# Altium PCB Pulp FMC Sensor Board_4X512Mbits_HyperRam.PcbDoc (part 1 of 2)
Units mm, origin at the board's own origin, x right, y up, seen from the top; angles counter-clockwise.
Board outline 62.85 x 58.85 mm, 4 copper layers (Top Layer, GND, PWR, Bottom Layer), stack 1.56 mm thick; 27 components, 33 nets, 302 pads, 158 vias.
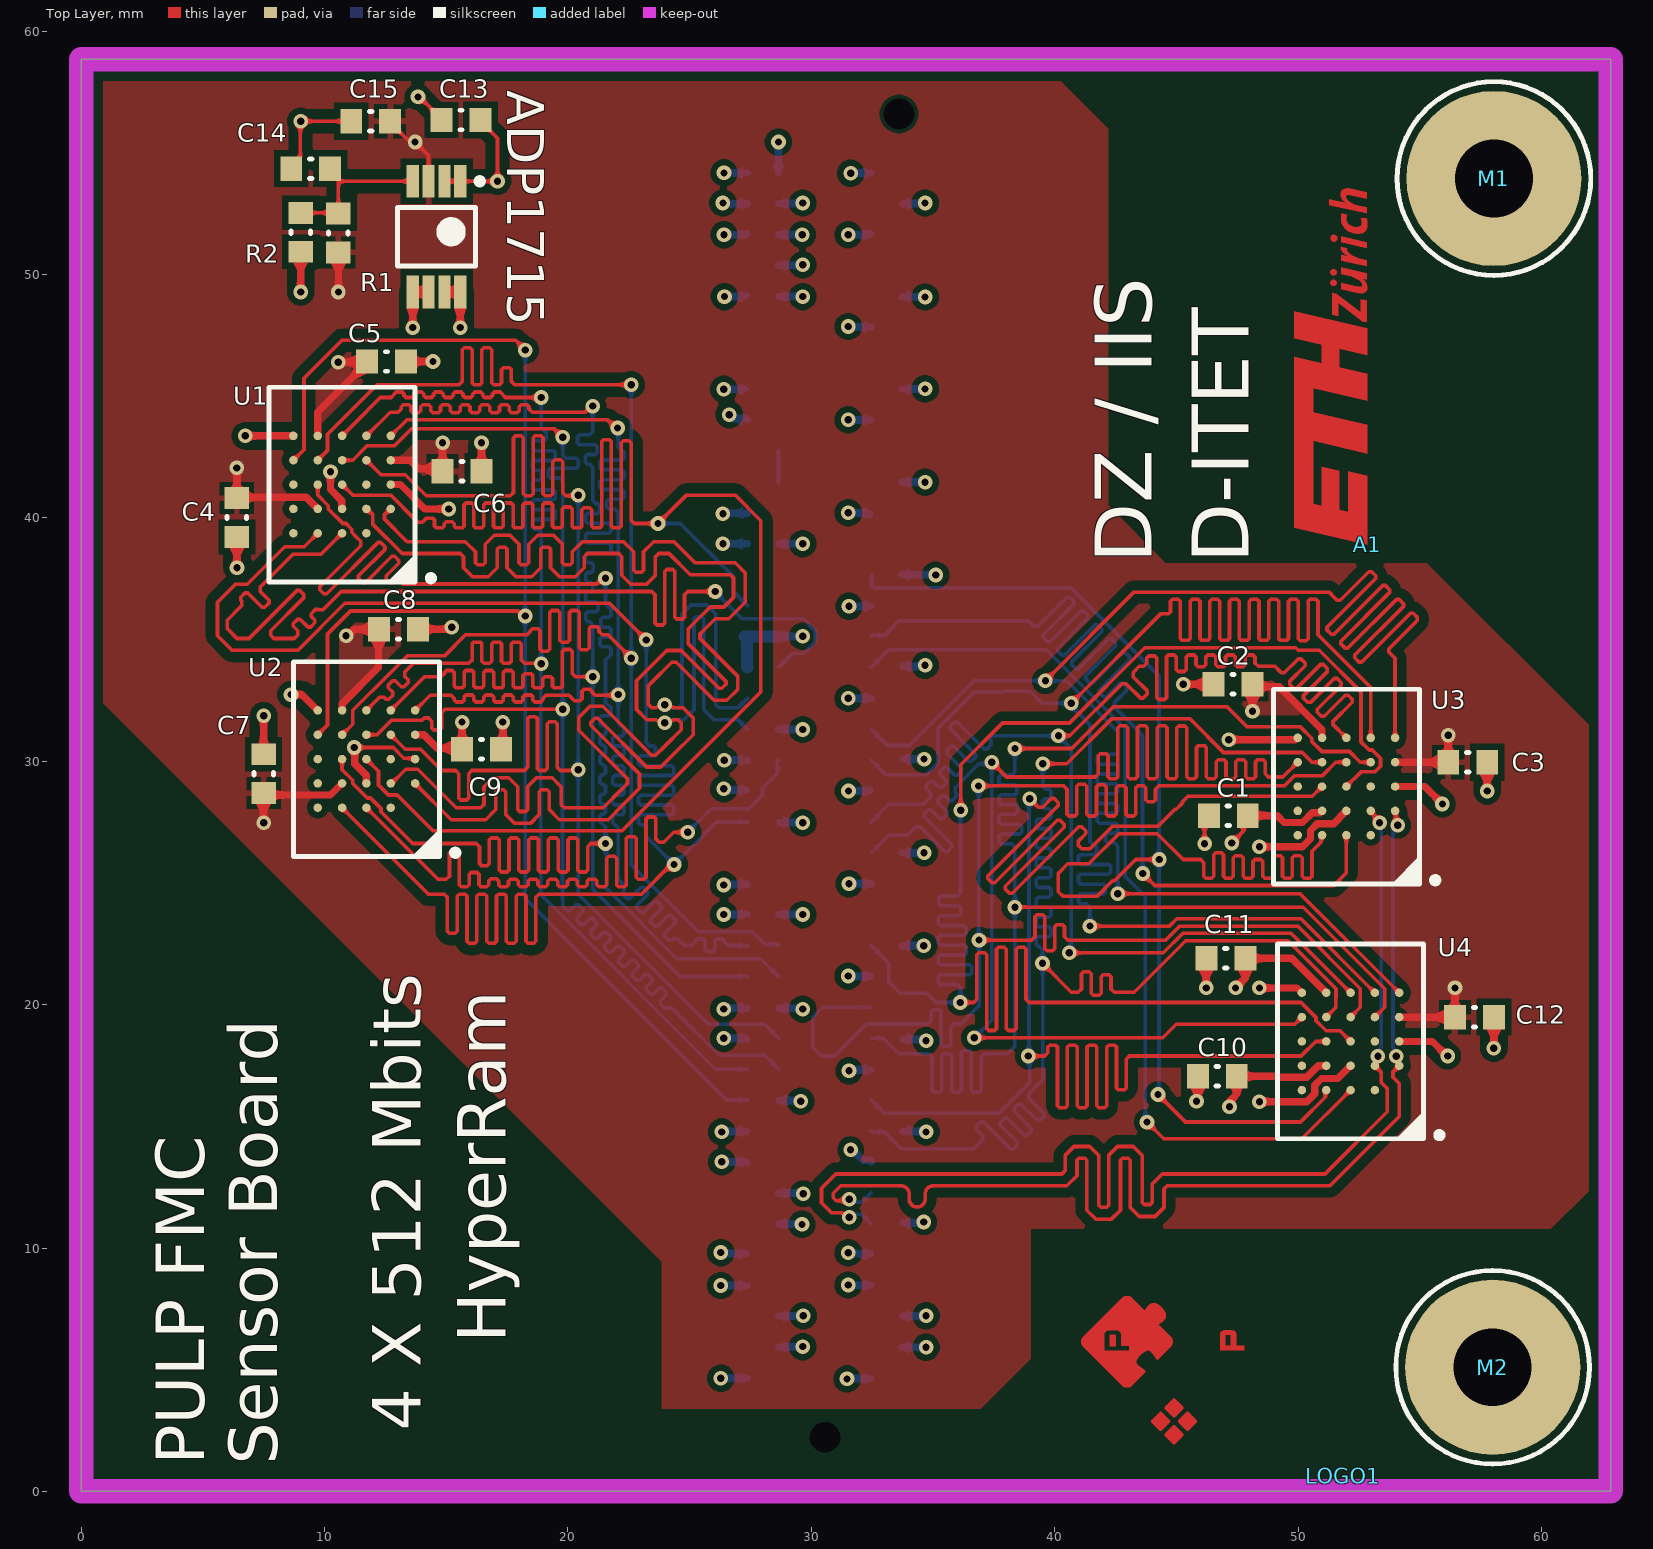
[diagram p0: Top Layer view]
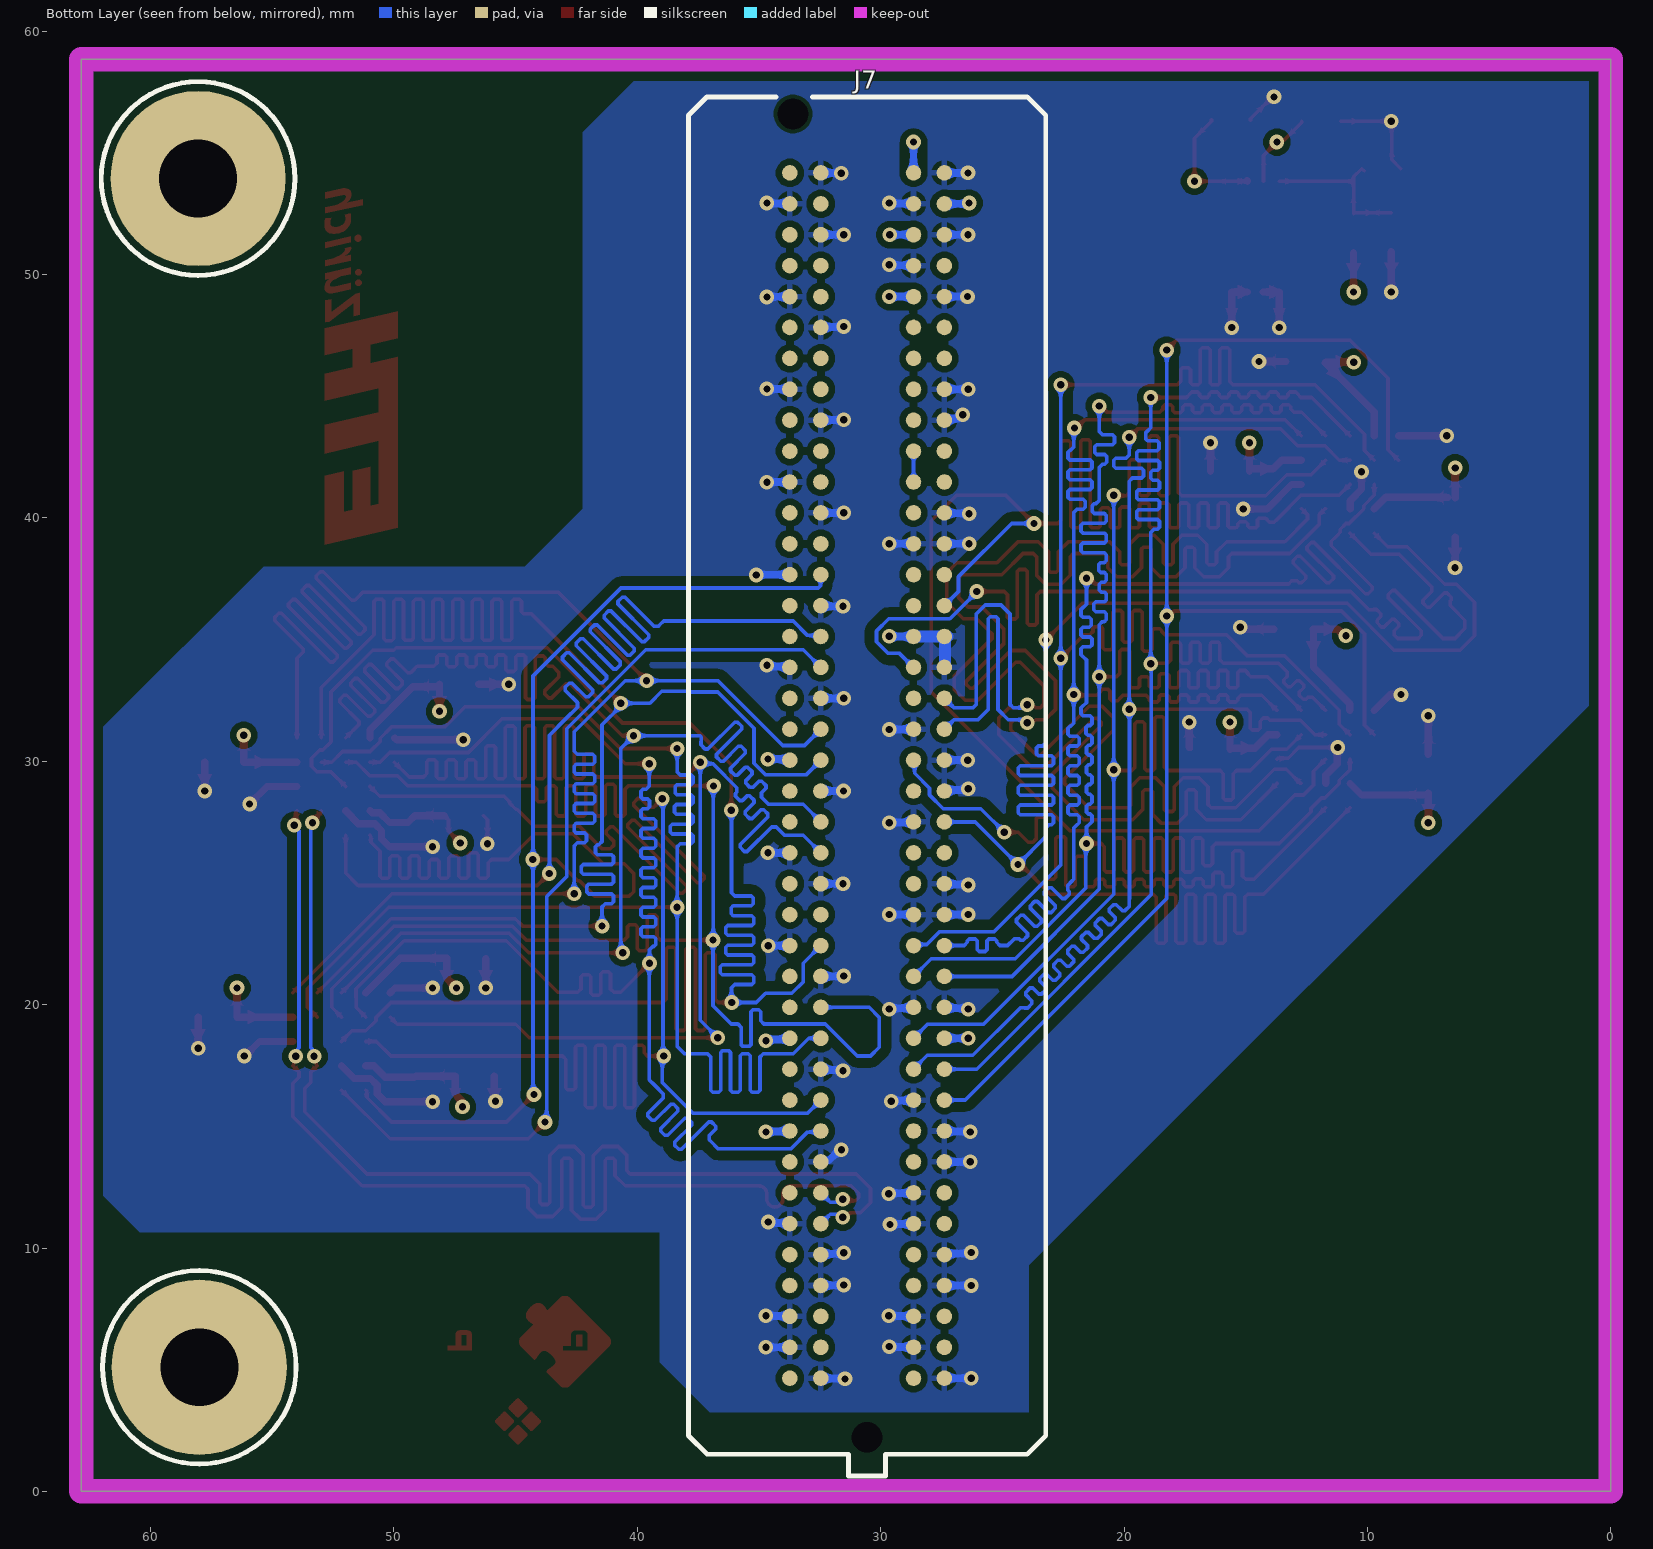
[diagram p1: Bottom Layer view, seen from below]
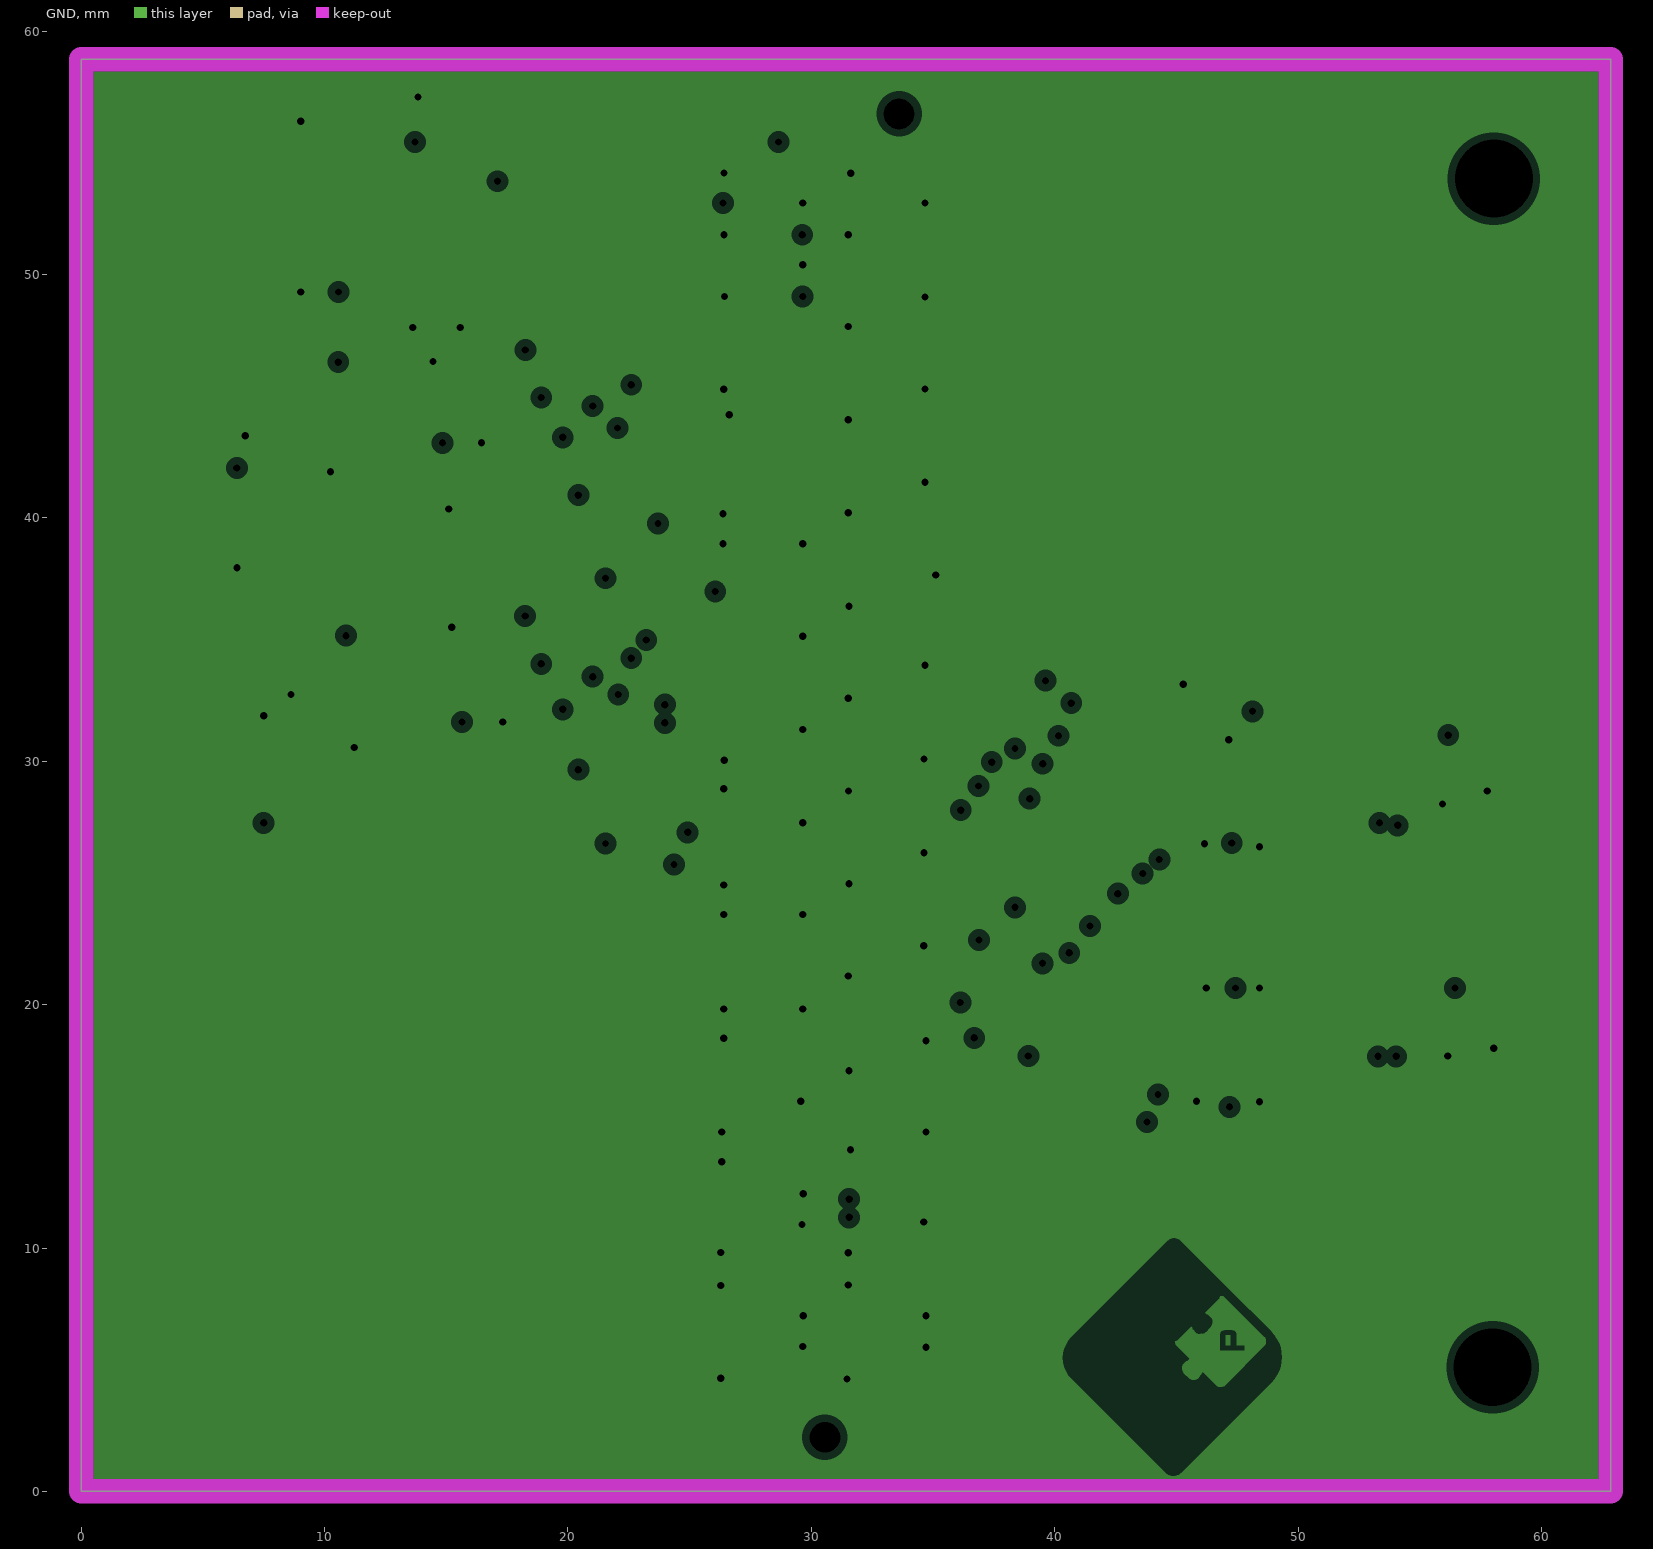
[diagram p2: GND, clearances drawn from the general rule]
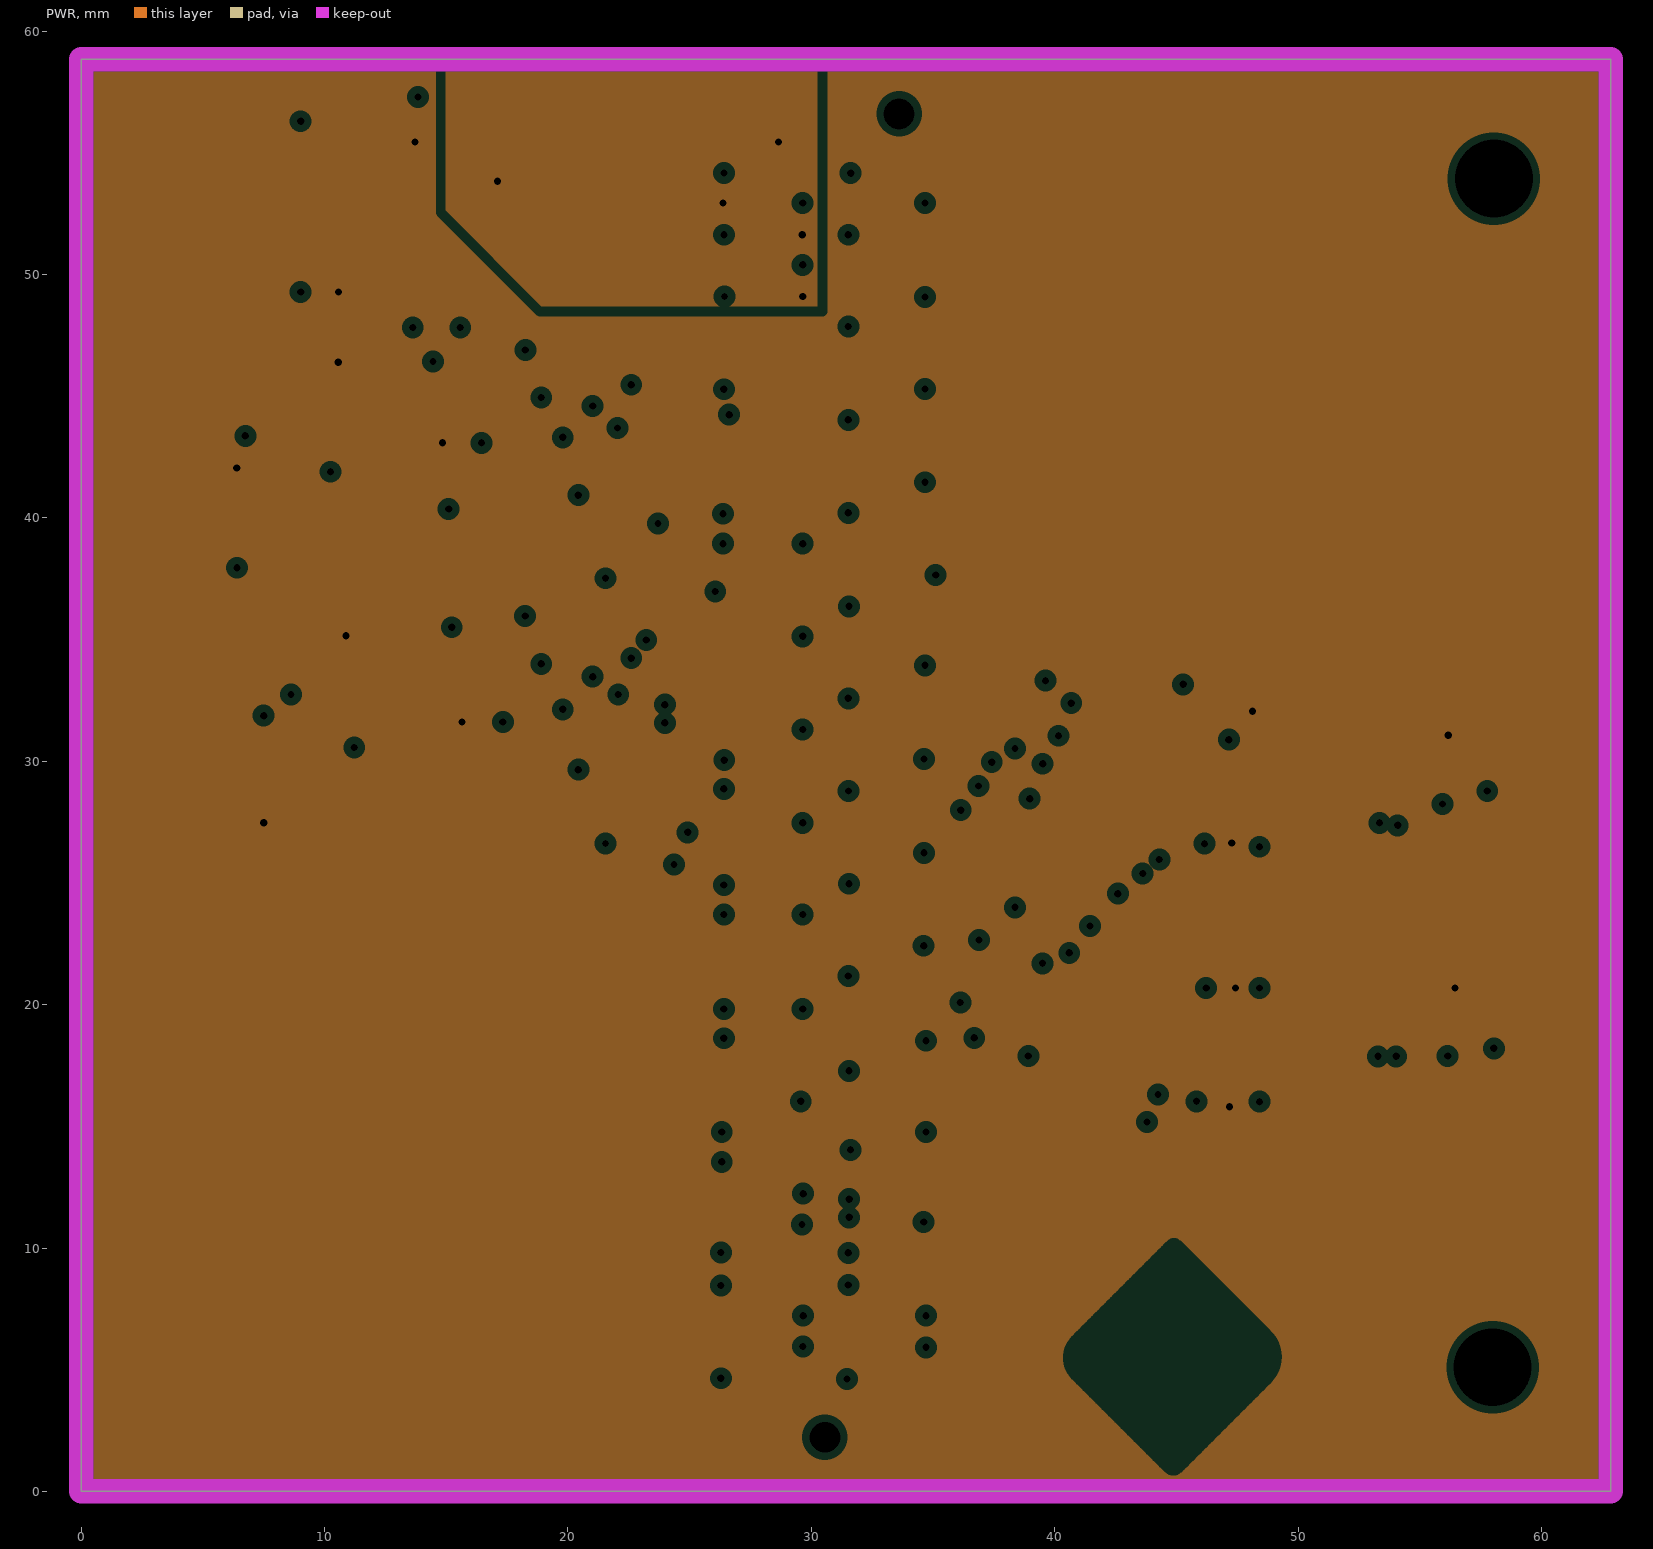
[diagram p3: PWR, clearances drawn from the general rule]

## Layer stack, top to bottom
Top Solder: solder mask 0.0254, SM-001, Dk 4
Top Layer: signal copper 0.035
Dielectric 1: prepreg 0.11, PP-017, Dk 4.29
GND: plane copper 0.035, net GND
Dielectric 3: core 1.2, Core-039, Dk 4.8
PWR: plane copper 0.035, net (Multiple Nets)
Dielectric 5: prepreg 0.11, PP-017, Dk 4.29
Bottom Layer: signal copper 0.035
Bottom Solder: solder mask 0.0254, SM-001, Dk 4

## Board outline
0,0 0,58.85 62.85,58.85 62.85,0

## Design rules (kind name [scope] priority, off if disabled: settings)
BoardOutlineClearance [All] p1: gap=0 ignorepadtopadclearanceinfootprint=FALSE except(0.4: Poly-OutlineEdge)
Clearance [All] p1: gap=0.15 ignorepadtopadclearanceinfootprint=FALSE except(0.2: Poly-Region Region-Region; 0.254: SMDPad-Poly THPad-Poly Via-Poly Fill-Poly Poly-Poly; 0.4: Arc-Poly Track-Poly)
ComponentClearance [All] p1 off: gap=0.35 collisioncheckmode=3 verticalgap=0.254 showdistances=FALSE
DiffPairsRouting [All] p1: maxlimit=0.339 minlimit=0.339 mostfreqgap=0.339 toplayer_minwidth=0.15 toplayer_maxwidth=0.15 toplayer_prefwidth=0.15 bottomlayer_minwidth=0.15 bottomlayer_maxwidth=0.15 bottomlayer_prefwidth=0.15 impedanceprofiledriven=TRUE impedanceprofileid={85C87672-306A-484E-A9E4-BAF9E07183F3} impedanceprofilevalue=100.000000 maxuncoupledlength=10
FabricationTestPointUsage TestPointUsage [All] p1: valid=0 allowmultiple=FALSE
FabricationTestpoint Testpoint [(IsPad And (OnTopLayer Or OnBottomLayer))] p1: side=3 testpointundercomponent=TRUE minsize=1.016 maxsize=2.54 preferedsize=1.524 minholesize=0 maxholesize=1.016 preferedholesize=0.813 testpointgrid=0.025 allowsidetop=TRUE allowsidebottom=TRUE usegrid=TRUE gridtolerance=0
Height [All] p1 off: minheight=0 maxheight=25.4 prefheight=12.7
HoleSize [All] p1: absolutevalues=TRUE maxlimit=7 minlimit=0.3 maxpercent=80.000 minpercent=20.000
MatchedLengths MatchLengths_xSignals_U2 [InxSignalClass('xSignals_U2')] p1: tolerance=5 checknetsindiffpair=FALSE checkdiffpairvsdiffpair=TRUE checkxsignals=TRUE checkothers=TRUE
MatchedLengths MatchLengths_xSignals_U3 [InxSignalClass('xSignals_U3')] p2: tolerance=5 checknetsindiffpair=FALSE checkdiffpairvsdiffpair=TRUE checkxsignals=TRUE checkothers=TRUE
MatchedLengths MatchLengths_xSignals_U5 [InxSignalClass('xSignals_U5')] p3: tolerance=5 checknetsindiffpair=FALSE checkdiffpairvsdiffpair=TRUE checkxsignals=TRUE checkothers=TRUE
MatchedLengths MatchLengths_xSignals_U1 [InxSignalClass('xSignals_U1')] p4: tolerance=5 checknetsindiffpair=FALSE checkdiffpairvsdiffpair=TRUE checkxsignals=TRUE checkothers=TRUE
MatchedLengths MatchedLengths_Diff_Pairs [All] p5: tolerance=1 checknetsindiffpair=TRUE checkdiffpairvsdiffpair=FALSE checkxsignals=FALSE checkothers=FALSE
MinimumAnnularRing [All] p1 off: minimumring=0.15
MinimumSolderMaskSliver [All] p1: minsoldermaskwidth=0.099
PlaneClearance [All] p1: clearance=0.3
PlaneConnect [All] p1: pad.planeconnectstyle=Relief pad.reliefexpansion=0.25 pad.reliefentries=4 pad.reliefconductorwidth=0.2 pad.reliefairgap=0.2 via.planeconnectstyle=Direct via.reliefexpansion=0.25 via.reliefentries=4 via.reliefconductorwidth=0.2 via.reliefairgap=0.2
PolygonConnect [All] p1: thpad.connectstyle=Relief thpad.reliefconductorwidth=0.25 thpad.reliefentries=4 thpad.polygonreliefangle="90 Angle" thpad.airgapwidth=0.2 smdpad.connectstyle=Relief smdpad.reliefconductorwidth=0.25 smdpad.reliefentries=4 smdpad.polygonreliefangle="90 Angle" smdpad.airgapwidth=0.2 via.connectstyle=Direct via.reliefconductorwidth=0.25 via.reliefentries=4 via.polygonreliefangle="90 Angle" via.airgapwidth=0.2
RoutingVias [All] p1: holewidth=0.3 width=0.6 viastyle="Through Hole" minholewidth=0.3 minwidth=0.6 maxholewidth=0.8 maxwidth=1.2
SilkToSilkClearance [All] p1: silktosilkclearance=0.01
SilkToSolderMaskClearance [IsPad] p1: minsilkscreentomaskgap=0.01 clearancetoexposedcopper=TRUE
SolderMaskExpansion [All] p1: expansion=0.075 istentingtop=FALSE
SupplyNets "Schematic Supply Nets_2" [InNet('V3p3')] p1: voltage=0.000
SupplyNets "Schematic Supply Nets_1" [InNet('GND')] p2: voltage=0.000
SupplyNets "Schematic Supply Nets" [InNet('Vmem_low')] p3: voltage=0.000
Width [All] p1: maxlimit=0.5 minlimit=0.15 preferedwidth=0.15 minimp=50.000000 maximp=50.000000 favimp=50.000000
19 further rules are at their usual default settings.

## Classes and differential pairs
net class Hyper2: FMC_HYPER2_CK_N FMC_HYPER2_CK_P FMC_HYPER2_CSN0 FMC_HYPER2_CSN1 FMC_HYPER2_D0 FMC_HYPER2_D1 FMC_HYPER2_D2 FMC_HYPER2_D3 FMC_HYPER2_D4 FMC_HYPER2_D5 FMC_HYPER2_D6 FMC_HYPER2_D7 FMC_HYPER2_RWDS
net class FMC_HYPER2_D[0..7]: FMC_HYPER2_D0 FMC_HYPER2_D1 FMC_HYPER2_D2 FMC_HYPER2_D3 FMC_HYPER2_D4 FMC_HYPER2_D5 FMC_HYPER2_D6 FMC_HYPER2_D7
net class FMC_HYPER2_CSN[0..1]: FMC_HYPER2_CSN0 FMC_HYPER2_CSN1
net class Hyper: FMC_HYPER_CK_N FMC_HYPER_CK_P FMC_HYPER_CSN0 FMC_HYPER_CSN1 FMC_HYPER_D0 FMC_HYPER_D1 FMC_HYPER_D2 FMC_HYPER_D3 FMC_HYPER_D4 FMC_HYPER_D5 FMC_HYPER_D6 FMC_HYPER_D7 FMC_HYPER_RWDS
net class FMC_HYPER_D[0..7]: FMC_HYPER_D0 FMC_HYPER_D1 FMC_HYPER_D2 FMC_HYPER_D3 FMC_HYPER_D4 FMC_HYPER_D5 FMC_HYPER_D6 FMC_HYPER_D7
net class FMC_HYPER_CSN[0..1]: FMC_HYPER_CSN0 FMC_HYPER_CSN1
component class U_HyperRAM: C1 C2 C3 C10 C11 C12 U3 U4
component class "U_FMC and Power": ADP1715 C13 C14 C15 J7 R1 R2
pad class DirectConnect: 30501-1 30501-2 30501-3 30501-4 30501-5 30501-6 30501-7 30501-8 30501-9 30502-1 30502-2 30502-3 30502-4 30502-5 30502-6 30502-7 30502-8 30502-9 30503-1 30503-2 30503-3 30503-4 30503-5 30503-6 30503-7 30503-8 30503-9 30504-1 30504-2 30504-3 30504-4 30504-5 30504-6 30504-7 30504-8 30504-9
pad class Sense: DPS1-A6 DPS1-A12 DPS1-B5 DPS1-B7 DPS1-B11 DPS1-B13 DPS1-B17 DPS1-C2 DPS1-C6 DPS1-C12 DPS1-C16 DPS2-A6 DPS2-A12 DPS2-B3 DPS2-B5 DPS2-B11 DPS2-B13 DPS2-C2 DPS2-C6 DPS2-C12 DPS2-C16 DPS3-C12
pad class Vias: DPS8-A9
pad class ExtendedClearance: O3216-A
component class U_HyperRAM2: A1 C4 C5 C6 C7 C8 C9 LOGO1 M1 M2 U1 U2
differential pair FMC_HYPER_CK: +FMC_HYPER_CK_P -FMC_HYPER_CK_N
differential pair FMC_HYPER2_CK: +FMC_HYPER2_CK_P -FMC_HYPER2_CK_N

## Components (designator, comment, footprint, x,y, rotation, side; value= is the part's Value field where it differs from the comment)
A1 "Logo ETH Zurich" eth-zurich_3mm 52.85,38.9 r90 top
ADP1715 "ADP1715" TSOP65P490X110-8N 14.597,51.563 r270 top
C1 "CAP 100nF 25V 0603(1608)" CAPC0603(1608)100_N 47.135,27.77 r0 top value=100nF
C2 "CAP 100nF 25V 0603(1608)" CAPC0603(1608)100_N 47.33,33.165 r0 top value=100nF
C3 "CAP 100nF 25V 0603(1608)" CAPC0603(1608)100_N 56.975,29.965 r180 top value=100nF
C4 "CAP 100nF 25V 0603(1608)" CAPC0603(1608)100_N 6.392,40.02 r90 top value=100nF
C5 "CAP 100nF 25V 0603(1608)" CAPC0603(1608)100_N 12.541,46.43 r180 top value=100nF
C6 "CAP 100nF 25V 0603(1608)" CAPC0603(1608)100_N 15.647,41.925 r180 top value=100nF
C7 "CAP 100nF 25V 0603(1608)" CAPC0603(1608)100_N 7.492,29.493 r270 top value=100nF
C8 "CAP 100nF 25V 0603(1608)" CAPC0603(1608)100_N 13.035,35.431 r180 top value=100nF
C9 "CAP 100nF 25V 0603(1608)" CAPC0603(1608)100_N 16.447,30.493 r180 top value=100nF
C10 "CAP 100nF 25V 0603(1608)" CAPC0603(1608)100_N 46.682,17.058 r0 top value=100nF
C11 "CAP 100nF 25V 0603(1608)" CAPC0603(1608)100_N 47.035,21.905 r0 top value=100nF
C12 "CAP 100nF 25V 0603(1608)" CAPC0603(1608)100_N 57.25,19.489 r180 top value=100nF
C13 "CAP 2.2 µF 25V 0603 (1608)" CAPC0603(1608)100_N 15.604,56.355 r180 top value=2.2uF
C14 "CAP 10nF 50V 0603(1608)" CAPC0603(1608)100_N 9.426,54.358 r0 top value=10nF
C15 "CAP 2.2 µF 25V 0603 (1608)" CAPC0603(1608)100_N 11.892,56.305 r0 top value=2.2uF
J7 "ASP-134604-01" ASP-134604-01 30.555,29.415 r270 bottom
LOGO1 "Logo Pulp" "Logo Pulp" 51.865,0.636 r90 top
M1 "Mounting Hole" "Hole M3" 58.05,53.95 r0 top
M2 "Mounting Hole" "Hole M3" 58,5.1 r0 top
R1 "15K 5% 0603(1608)" RESC0603(1608)_N 10.566,51.713 r270 top value="15K DNP"
R2 "12K 5% 0603(1608)" RESC0603(1608)_N 9.016,51.741 r90 top value=12KDNP
U1 "S80KS5122" FBGA24_A-130 10.716,41.375 r180 top
U2 "S80KS5122" FBGA24_A-130 11.716,30.093 r180 top
U3 "S80KS5122" FBGA24_A-130 51.988,28.965 r180 top
U4 "S80KS5122" FBGA24_A-130 52.159,18.489 r180 top

## Footprints (in the part's own frame and the unit in brackets; to place one, negate y for a bottom-side part, rotate by r counter-clockwise, add the part's x,y. Pads: shape width x height; smd on the part's side, far side on the other; paste and mask are expansions set on the pad)
ASP-134604-01 [mm] "FMC 160 Position Connector Array, Male Pins Surface Mount Gold"
  round 0.64 smd: C1(24.765,3.175) C2(23.495,3.175) C3(22.225,3.175) C4(20.955,3.175) C5(19.685,3.175) C6(18.415,3.175) C7(17.145,3.175) C8(15.875,3.175) C9(14.605,3.175) C10(13.335,3.175) C11(12.065,3.175) C12(10.795,3.175) C13(9.525,3.175) C14(8.255,3.175) C15(6.985,3.175) C16(5.715,3.175) C17(4.445,3.175) C18(3.175,3.175) C19(1.905,3.175) C20(0.635,3.175) C21(-0.635,3.175) C22(-1.905,3.175) C23(-3.175,3.175) C24(-4.445,3.175) C25(-5.715,3.175) C26(-6.985,3.175) C27(-8.255,3.175) C28(-9.525,3.175) C29(-10.795,3.175) C30(-12.065,3.175) C31(-13.335,3.175) C32(-14.605,3.175) C33(-15.875,3.175) C34(-17.145,3.175) C35(-18.415,3.175) C36(-19.685,3.175) C37(-20.955,3.175) C38(-22.225,3.175) C39(-23.495,3.175) C40(-24.765,3.175) D1(24.765,1.905) D2(23.495,1.905) D3(22.225,1.905) D4(20.955,1.905) D5(19.685,1.905) D6(18.415,1.905) D7(17.145,1.905) D8(15.875,1.905) D9(14.605,1.905) D10(13.335,1.905) D11(12.065,1.905) D12(10.795,1.905) D13(9.525,1.905) D14(8.255,1.905) D15(6.985,1.905) D16(5.715,1.905) D17(4.445,1.905) D18(3.175,1.905) D19(1.905,1.905) D20(0.635,1.905) D21(-0.635,1.905) D22(-1.905,1.905) D23(-3.175,1.905) D24(-4.445,1.905) D25(-5.715,1.905) D26(-6.985,1.905) D27(-8.255,1.905) D28(-9.525,1.905) D29(-10.795,1.905) D30(-12.065,1.905) D31(-13.335,1.905) D32(-14.605,1.905) D33(-15.875,1.905) D34(-17.145,1.905) D35(-18.415,1.905) D36(-19.685,1.905) D37(-20.955,1.905) D38(-22.225,1.905) D39(-23.495,1.905) D40(-24.765,1.905) G1(24.765,-1.905) G2(23.495,-1.905) G3(22.225,-1.905) G4(20.955,-1.905) G5(19.685,-1.905) G6(18.415,-1.905) G7(17.145,-1.905) G8(15.875,-1.905) G9(14.605,-1.905) G10(13.335,-1.905) G11(12.065,-1.905) G12(10.795,-1.905) G13(9.525,-1.905) G14(8.255,-1.905) G15(6.985,-1.905) G16(5.715,-1.905) G17(4.445,-1.905) G18(3.175,-1.905) G19(1.905,-1.905) G20(0.635,-1.905) G21(-0.635,-1.905) G22(-1.905,-1.905) G23(-3.175,-1.905) G24(-4.445,-1.905) G25(-5.715,-1.905) G26(-6.985,-1.905) G27(-8.255,-1.905) G28(-9.525,-1.905) G29(-10.795,-1.905) G30(-12.065,-1.905) G31(-13.335,-1.905) G32(-14.605,-1.905) G33(-15.875,-1.905) G34(-17.145,-1.905) G35(-18.415,-1.905) G36(-19.685,-1.905) G37(-20.955,-1.905) G38(-22.225,-1.905) G39(-23.495,-1.905) G40(-24.765,-1.905) H1(24.765,-3.175) H2(23.495,-3.175) H3(22.225,-3.175) H4(20.955,-3.175) H5(19.685,-3.175) H6(18.415,-3.175) H7(17.145,-3.175) H8(15.875,-3.175) H9(14.605,-3.175) H10(13.335,-3.175) H11(12.065,-3.175) H12(10.795,-3.175) H13(9.525,-3.175) H14(8.255,-3.175) H15(6.985,-3.175) H16(5.715,-3.175) H17(4.445,-3.175) H18(3.175,-3.175) H19(1.905,-3.175) H20(0.635,-3.175) H21(-0.635,-3.175) H22(-1.905,-3.175) H23(-3.175,-3.175) H24(-4.445,-3.175) H25(-5.715,-3.175) H26(-6.985,-3.175) H27(-8.255,-3.175) H28(-9.525,-3.175) H29(-10.795,-3.175) H30(-12.065,-3.175) H31(-13.335,-3.175) H32(-14.605,-3.175) H33(-15.875,-3.175) H34(-17.145,-3.175) H35(-18.415,-3.175) H36(-19.685,-3.175) H37(-20.955,-3.175) H38(-22.225,-3.175) H39(-23.495,-3.175) H40(-24.765,-3.175)
  round 0.97 hole 1.27 unplated: MH1(-27.19,-3.05) MH2(27.19,0)
  silkscreen extent -27.89,-7.34 28.78,7.34, body extent -27.89,-7.34 28.78,7.34, height 7.12
CAPC0603(1608)100_N [mm] "Chip Capacitor, Body 1.6x0.8mm, Height 1.0mm, IPC Medium Density"
  rect 0.9x1 smd: 1(-0.8,0) 2(0.8,0)
  silkscreen extent -0.05,-0.4 0.05,0.4, body extent -0.87,-0.48 0.88,0.47, height 1
eth-zurich_3mm [mm] "Logo ETH Zurich"
  Top Layer circle w0.27: c10.764,1.389 r0.001
  Top Layer circle w0.27: c11.193,1.389 r0.001
  Top Layer circle w0.3: c12.598,1.372 r0.001
  Top Layer region: 8.895,0 8.895,0 9.6,3 8.493,3 8.227,1.87 7.459,1.87 7.723,3 0.705,3 0,0 1.171,0 2.838,0 3.021,0.78 1.356,0.78 1.442,1.146 3.034,1.146 3.204,1.866 1.609,1.866 1.693,2.22 4.273,2.22 3.75,0 4.923,0 5.445,2.22 6.433,2.22 5.913,0 7.02,0 7.29,1.151 8.058,1.151 7.788,0
  Top Layer region: 10.359,1.44 10.359,1.44 9.452,1.44 9.396,1.191 9.945,1.191 9.172,0.185 9.138,0.024 10.044,0.024 10.099,0.273 9.549,0.273 10.325,1.284
  Top Layer region: 11.166,0.024 11.166,0.024 11.398,1.071 11.121,1.071 11.031,0.661 10.98,0.54 10.92,0.432 10.86,0.336 10.8,0.273 10.752,0.24 10.704,0.216 10.668,0.216 10.632,0.228 10.608,0.252 10.602,0.288 10.602,0.336 10.608,0.378 10.763,1.071 10.496,1.071 10.38,0.54 10.336,0.342 10.332,0.252 10.344,0.168 10.368,0.096 10.416,0.048 10.476,0.012 10.524,0 10.62,0 10.716,0.024 10.8,0.072 10.863,0.135 10.932,0.216 10.89,0.024
  Top Layer region: 11.857,0.78 11.857,0.78 11.922,1.071 11.676,1.071 11.444,0.024 11.689,0.024 11.727,0.193 11.784,0.378 11.85,0.54 11.904,0.642 11.979,0.741 12.03,0.792 12.072,0.822 12.114,0.84 12.144,0.84 12.184,0.83 12.24,1.08 12.204,1.086 12.168,1.086 12.132,1.08 12.078,1.056 12.042,1.032 11.994,0.99 11.952,0.948 11.904,0.876
  Top Layer region: 12.438,0.024 12.438,0.024 12.671,1.071 12.424,1.071 12.192,0.024
  Top Layer region: 13.614,1.051 13.614,1.051 13.56,1.071 13.5,1.08 13.404,1.08 13.296,1.071 13.182,1.044 13.086,0.996 13.008,0.936 12.96,0.888 12.912,0.828 12.87,0.756 12.84,0.684 12.81,0.6 12.792,0.522 12.78,0.444 12.78,0.342 12.792,0.252 12.81,0.192 12.84,0.132 12.876,0.084 12.924,0.048 12.978,0.024 13.032,0.012 13.152,0 13.212,0 13.32,0.012 13.387,0.028 13.416,0.036 13.441,0.272 13.386,0.252 13.308,0.234 13.248,0.228 13.206,0.228 13.158,0.24 13.116,0.264 13.092,0.288 13.074,0.324 13.062,0.366 13.056,0.408 13.056,0.462 13.068,0.54 13.092,0.618 13.122,0.684 13.158,0.738 13.212,0.804 13.26,0.834 13.308,0.852 13.356,0.858 13.428,0.858 13.494,0.852 13.524,0.846 13.566,0.834
  Top Layer region: 14.118,0.96 14.118,0.96 14.049,0.879 14.2,1.562 13.955,1.562 13.614,0.024 13.86,0.024 13.95,0.433 14.001,0.555 14.061,0.663 14.121,0.759 14.181,0.822 14.229,0.855 14.277,0.879 14.313,0.879 14.349,0.867 14.373,0.843 14.379,0.807 14.379,0.759 14.373,0.717 14.219,0.024 14.486,0.024 14.601,0.555 14.644,0.753 14.649,0.843 14.637,0.927 14.613,0.999 14.565,1.047 14.505,1.083 14.457,1.095 14.361,1.095 14.265,1.071 14.181,1.023
FBGA24_A-130 [mm] "BGA, 24-Balls, Body 8x6mm, Pitch 1mm, A1 missing"
  round 0.35 smd paste-0.35: A2(-1,2) A3(0,2) A4(1,2) A5(2,2) B1(-2,1) B2(-1,1) B3(0,1) B4(1,1) B5(2,1) C1(-2,0) C2(-1,0) C3(0,0) C4(1,0) C5(2,0) D1(-2,-1) D2(-1,-1) D3(0,-1) D4(1,-1) D5(2,-1) E1(-2,-2) E2(-1,-2) E3(0,-2) E4(1,-2) E5(2,-2)
  silkscreen extent -3.78,-4 3,4, body extent -3,-4 3,4, height 1.3
"Hole M3" [mm] "Plated Thru-Hole, 3.2mm hole, 7.2mm pad"
  round 7.2 hole 3.2: 1(0,0)
  silkscreen extent -3.98,-3.98 3.98,3.98
"Logo Pulp" [mm]
  Top Layer pour cut-out: 0.148,7.319 0.044,7.171 0.004,6.994 0.035,6.815 0.132,6.662 0.132,6.662 3.83,2.964 4.312,2.641 4.881,2.528 5.45,2.641 5.932,2.963 5.932,2.963 9.66,6.699 9.755,6.864 9.755,7.055 9.66,7.22 9.66,7.22 5.754,11.118 5.346,11.419 4.851,11.525 4.355,11.419 3.947,11.118 3.947,11.118
  Top Layer region: 5.163,5.057 5.163,4.066 5.341,4.066 5.341,4.854 5.798,4.854 5.798,4.625 5.341,4.625 5.341,4.396 5.824,4.396 5.902,4.428 5.956,4.492 5.976,4.574 5.976,4.574 5.976,4.879 5.96,4.955 5.915,5.017 5.849,5.057 5.849,5.057
  Top Layer region: 5.792,9.588 5.792,9.582 5.792,9.575 5.792,9.569 5.792,9.563 5.792,9.556 5.792,9.55 5.792,9.544 5.792,9.537 5.792,9.531 5.792,9.525 5.792,9.518 5.792,9.512 5.792,9.506 5.792,9.499 5.792,9.493 5.792,9.487 5.792,9.48 5.792,9.474 5.792,9.468 5.792,9.461 5.792,9.455 5.792,9.448 5.792,9.442 5.792,9.436 5.792,9.429 5.792,9.423 5.792,9.417 5.792,9.41 5.792,9.404 5.792,9.398 5.792,9.391 5.792,9.385 5.792,9.379 5.792,9.372 5.792,9.366 5.786,9.366 5.786,9.36 5.335,9.36 5.335,9.366 5.328,9.366 5.328,9.372 5.328,9.379 5.328,9.385 5.328,9.391 5.328,9.398 5.328,9.404 5.328,9.41 5.328,9.417 5.328,9.423 5.328,9.429 5.328,9.436 5.328,9.442 5.328,9.448 5.328,9.455 5.328,9.461 5.328,9.468 5.328,9.474 5.328,9.48 5.328,9.487 5.328,9.493 5.328,9.499 5.328,9.506 5.328,9.512 5.328,9.518 5.328,9.525 5.328,9.531 5.328,9.537 5.328,9.544 5.328,9.55 5.328,9.556 5.328,9.563 5.328,9.569 5.328,9.575 5.328,9.582 5.328,9.588 5.328,9.595 5.792,9.595
  Top Layer region: 2639 vertices and 1 holes, not listed, extent 3.633,7.01 7.392,10.776
  Top Layer region: 477 vertices and 0 holes, not listed, extent 1.851,7.124 2.632,7.899
  Top Layer region: 477 vertices and 0 holes, not listed, extent 2.404,6.572 3.185,7.347
  Top Layer region: 477 vertices and 0 holes, not listed, extent 1.299,6.572 2.08,7.347
  Top Layer region: 477 vertices and 0 holes, not listed, extent 1.851,6.019 2.632,6.794
  Bottom Layer pour cut-out: 0.148,7.322 0.044,7.174 0.004,6.997 0.035,6.818 0.132,6.665 0.132,6.665 3.83,2.967 4.312,2.644 4.881,2.531 5.45,2.644 5.932,2.966 5.932,2.966 9.66,6.702 9.755,6.867 9.755,7.058 9.66,7.223 9.66,7.223 5.754,11.121 5.346,11.422 4.851,11.528 4.355,11.422 3.947,11.121 3.947,11.121
  GND region: 5.932,2.966 5.45,2.644 4.881,2.531 4.881,2.531 4.881,2.531 4.313,2.644 3.831,2.965 3.831,2.965 0.132,6.665 0.037,6.807 0.004,6.974 0.004,6.974 0.004,6.997 0.037,7.164 0.132,7.306 0.132,7.306 4.002,11.176 4.392,11.437 4.851,11.528 4.851,11.528 5.31,11.437 5.699,11.176 5.699,11.176 9.653,7.223 9.737,7.104 9.768,6.962 9.768,6.962 9.768,6.962 9.739,6.821 9.66,6.702 9.66,6.702 6.833,3.861 6.807,3.835 6.567,4.075 6.545,4.075 7.383,4.912 7.398,4.937 7.401,4.965 7.401,4.965 7.401,5.086 7.401,5.086 7.319,5.103 7.249,5.149 7.249,5.149 6.709,5.689 6.702,5.689 6.632,5.619 6.62,5.602 6.616,5.582 6.616,5.582 6.613,5.564 6.602,5.548 6.602,5.548 6.508,5.454 6.431,5.403 6.34,5.385 6.34,5.385 6.34,5.385 6.2,5.413 6.08,5.492 6.08,5.492 5.933,5.639 5.86,5.749 5.834,5.878 5.834,5.878 5.834,5.919 5.847,5.984 5.884,6.04 5.884,6.04 6.02,6.175 6.046,6.193 6.078,6.199 6.078,6.199 6.095,6.199 6.144,6.248 6.144,6.255 5.601,6.798 5.561,6.857 5.547,6.928 5.547,6.928 5.5,6.928 5.417,6.911 5.347,6.864 5.347,6.864 4.81,6.328 4.81,6.328 4.791,6.347 4.791,6.363 4.734,6.42 4.734,6.448 4.689,6.493 4.689,6.509 4.637,6.561 4.547,6.621 4.442,6.642 4.442,6.642 4.301,6.614 4.182,6.534 4.182,6.534 4.044,6.396 3.962,6.275 3.934,6.131 3.934,6.131 3.951,6.046 3.999,5.974 3.999,5.974 4.086,5.886 4.104,5.883 4.119,5.873 4.119,5.873 4.169,5.823 4.17,5.823 4.186,5.819 4.2,5.81 4.2,5.81 4.213,5.797 4.226,5.797 4.251,5.772 3.703,5.224 3.658,5.156 3.642,5.075 3.642,5.075 3.642,5.029 3.66,4.935 3.714,4.856 3.714,4.856 5.347,3.222 5.415,3.177 5.495,3.162 5.495,3.162 5.508,3.162 5.626,3.186 5.726,3.252 5.726,3.252 6.545,4.072 6.565,4.07 6.583,4.06 6.583,4.06 6.807,3.835 5.938,2.966
  GND region: 5.163,5.057 5.163,4.066 5.341,4.066 5.341,4.854 5.798,4.854 5.798,4.625 5.341,4.625 5.341,4.396 5.824,4.396 5.902,4.428 5.956,4.492 5.976,4.574 5.976,4.574 5.976,4.879 5.96,4.955 5.915,5.017 5.849,5.057 5.849,5.057
  PWR region: 1590 vertices and 1 holes, not listed, extent 0.017,2.533 9.768,11.518
  PWR region: 1100 vertices and 0 holes, not listed, extent 6.785,6.091 8.118,7.291
  PWR region: 307 vertices and 0 holes, not listed, extent 7.356,6.631 7.541,7.596
RESC0603(1608)_N [mm] "Chip Resistor, Body 1.6x0.8mm, IPC Medium Density"
  rect 0.9x1 smd: 1(-0.8,0) 2(0.8,0)
  silkscreen extent -0.05,-0.4 0.05,0.4, body extent -0.85,-0.47 0.85,0.47, height 0.6
TSOP65P490X110-8N [mm] "TSOP, 8-Leads, Body 3,00x3,00mm, Pitch 0,65mm, IPC Medium Density"
  rect 1.35x0.5 smd mask+0.025: 1(-2.275,0.975) 2(-2.275,0.325) 3(-2.275,-0.325) 4(-2.275,-0.975) 5(2.275,-0.975) 6(2.275,-0.325) 7(2.275,0.325) 8(2.275,0.975)
  silkscreen extent -2.4,-1.6 1.2,1.9, body extent -2.45,-1.6 2.45,1.6, height 1.1

## Part data
A1: library part CMP-00038-1
ADP1715: "IC REG LINEAR 1.8V 500MA 8MSOP / Mfr No: ADP1715ARMZ-1.8-R7 / Supplier No: ADP1715ARMZ-1.8-R7CT-ND"
C1 C2 C3 C4 C5 C6 C7 C8 C9 C10 C11 C12: library part CMP-1035-02588-1, "CAP 100nF 25V ±10% 0603 (1608 Metric) Thickness 1mm SMD", Case-EIA=0603, Case-Metric=1608, Rated Voltage="25 V", Tolerance=Â±10%, Max Thickness="1 mm", Technology=SMT
C13 C15: library part CMP-1035-02588-1, "CAP 2.2 µF ±10% 25V X7R 0603 (1608 Metric) Thickness 1.80mm SMD", Case-EIA=0603, Case-Metric=1608, Rated Voltage="25 V", Tolerance=Â±10%, Max Thickness="1 mm", Technology=SMT
C14: library part CMP-1035-02588-1, "CAP 10nF  ±10% 50V CH  0603 (1608 Metric) Thickness 0.75mm SMD", Case-EIA=0603, Case-Metric=1608, Rated Voltage="25 V", Tolerance=Â±10%, Max Thickness="1 mm", Technology=SMT
J7: library part CMP-00488-1, "Conn Array Terminal FMC Male SKT 160 POS 1.27mm Solder ST SMD", Manufacturer=Samtec, Supplier Part Number=SAM8732-ND, ComponentLink1Description=asp-134604-01-9532665.pdf, ComponentLink1URL=https://datasheet.ciiva.com/9532/asp-134604-01-9532665.pdf, ComponentLink2Description=asp-134604-01-403751.pdf, ComponentLink2URL=https://datasheet.ciiva.com/403/asp-134604-01-403751.pdf, Length=55.78mm, Manufacturer Part Number=ASP-134604-01, Number of arrays=4, Number of poles=160, Pitch=1.27mm, Product Type=SKT, Supplier=Digikey, Width=14.68mm, Wire connection method=Solder
LOGO1: library part CMP-00145-1, "4 Layers: only valid for layer stack as defined for the TestBoards"
M1 M2: library part CMP-00023-1, "Mounting Hole, 7.2mm pad, 3.2mm plated hole", ClassName="Mounting Hole"
R1: library part CMP-1012-00098-1, "15K 0.1W 5% 0603 (1608 Metric)  SMD", Case-EIA=0603, Case-Metric=1608, Power="0.1 W", Tolerance="5 %", Technology=SMT
R2: library part CMP-1012-00098-1, "12K 0.1W 5% 0603 (1608 Metric)  SMD", Case-EIA=0603, Case-Metric=1608, Power="0.1 W", Tolerance="5 %", Technology=SMT
U1 U2 U3 U4: library part CMP-00514-1, "512 Mb: HYPERRAM™ self-refresh dynamic / RAM (DRAM) with HYPERBUS™ interface 1.8 V / 512 Mb: HYPERRAM™ self-refresh dynamic / RAM (DRAM) with HYPERBUS™ interface / 1.8 V / Mfr No: S80KS5122GABHI020 / Supplier No: 727-S5122GABHI020", Manufacturer="Cypress Semiconductor Corp", Package / Case=24-VBGA, Supplier Device Package=24-FBGA(6x8), Voltage - Supply=1.8V, Interface="Parallel, Serial", Memory Format="FLASH, RAM", Memory Size="512Mbit Flash, 64Mbit RAM", Memory Type=Non-Volatile, Series="HyperFlash™ + HyperRAM™ KS", Speed=100MHz

## Via types
v1: diameter 0.6, hole 0.3, Top Layer to Bottom Layer, tented both sides, 156 vias
v2: diameter 0.6, hole 0.3, Top Layer to Bottom Layer, 2 vias

## Nets (pads, with @x,y where several pads share a name; then routed paths per layer and width w, separated by ;. In a path a pad name is that pad's centre, name@x,y a point inside that pad or via, vN(x,y) a via of type N, cw(c..) or ccw(c..) an arc to the next point about the centre after c; other vN are vias at no path point)
FMC_HYPER2_CK_N: J7.C23 U1.B1 U2.B1 | length 73.3
  Top Layer w0.15: U1.B1@12.716,40.375 12.692,40.375 12.46,40.143 12.46,39.957 13.379,39.038 13.389,39.028 15.779,39.028 16.197,38.61 16.197,38.159 16.278,38.079 16.521,38.079 16.601,38.159 16.601,38.925 16.969,39.292 17.617,39.292 17.984,38.925 17.984,38.159 18.065,38.079 18.307,38.079 18.388,38.159 18.388,38.925 18.756,39.292 19.404,39.292 19.771,38.925 19.771,38.159 19.852,38.079 20.094,38.079 20.175,38.159 20.175,38.61 20.594,39.028 21.015,39.028 22.281,39.028 22.7,38.61 22.7,37.85 22.78,37.769 23.023,37.769 23.104,37.85 23.104,38.61 23.522,39.028 23.943,39.028 24.355,39.028 25.223,38.159 26.871,38.159 27.289,37.741 27.289,36.534 26.611,35.855 26.05,35.855 25.58,35.385 25.426,35.231 25.426,35.044 26.983,33.487 26.983,32.968 26.525,32.51 26.005,32.51 24.448,34.067 24.262,34.067 23.43,33.235 23.305,33.11 23.305,32.332 23.437,32.2 23.623,32.2 23.667,32.244 23.894,32.244 v1(23.98,32.33) 24.066,32.244 24.292,32.244 24.337,32.2 24.726,32.2 25.144,31.781 25.144,31.098 24.329,30.282 23.814,29.768 23.223,29.768 21.221,31.769 21.107,31.769 20.935,31.598 20.935,31.484 22.937,29.482 22.937,28.89 22.639,28.593 22.219,28.173 21.65,27.603 19.646,27.603 19.228,28.022 19.228,28.755 19.147,28.836 18.905,28.836 18.824,28.755 18.824,27.818 18.456,27.45 17.809,27.45 17.441,27.818 17.441,28.755 17.36,28.836 17.118,28.836 17.037,28.755 17.037,28.022 16.618,27.603 16.197,27.603 15.205,27.603 U2.B1@13.716,29.093
  Bottom Layer w0.15: v1@24.205,32.2 24.337,32.2 24.555,32.2 24.687,32.332 24.687,36.059 25.054,36.426 25.702,36.426 26.07,36.059 26.07,32.332 26.202,32.2 26.99,32.2 J7.C23@27.38,32.59
FMC_HYPER2_CK_P: J7.C22 U1.B2 U2.B2 | length 73.8
  Top Layer w0.15: U1.B2@11.716,40.375 11.739,40.375 11.971,40.143 11.971,39.754 13.186,38.539 13.379,38.539 15.576,38.539 15.708,38.407 15.708,37.957 16.075,37.589 16.723,37.589 17.091,37.957 17.091,38.722 17.172,38.803 17.414,38.803 17.495,38.722 17.495,37.957 17.862,37.589 18.51,37.589 18.878,37.957 18.878,38.722 18.959,38.803 19.201,38.803 19.282,38.722 19.282,37.957 19.649,37.589 20.297,37.589 20.665,37.957 20.665,38.407 20.796,38.539 21.015,38.539 22.078,38.539 22.21,38.407 22.21,37.648 22.578,37.28 23.226,37.28 23.593,37.648 23.593,38.407 23.725,38.539 23.943,38.539 24.152,38.539 25.021,37.67 26.668,37.67 26.8,37.538 26.8,36.736 26.408,36.344 25.847,36.344 25.234,35.731 24.936,35.434 24.936,34.842 26.493,33.285 26.493,33.17 26.322,32.999 26.208,32.999 24.651,34.556 24.059,34.556 23.084,33.581 22.815,33.313 22.815,32.129 23.234,31.71 23.623,31.71 23.667,31.666 23.894,31.666 v1(23.98,31.58) 24.066,31.666 24.292,31.666 24.337,31.71 24.523,31.71 24.655,31.578 24.655,31.3 23.983,30.628 23.612,30.257 23.425,30.257 21.424,32.259 20.904,32.259 20.446,31.801 20.446,31.281 22.447,29.279 22.447,29.093 22.293,28.939 22.219,28.865 21.447,28.093 19.849,28.093 19.717,28.224 19.717,28.957 19.35,29.325 18.702,29.325 18.334,28.957 18.334,28.02 18.254,27.939 18.011,27.939 17.93,28.02 17.93,28.957 17.563,29.325 16.915,29.325 16.547,28.957 16.547,28.224 16.416,28.093 16.197,28.093 15.408,28.093 13.969,29.532 13.827,29.674 13.333,29.674 12.752,29.093 U2.B2@12.716,29.093
  Bottom Layer w0.15: v1@24.205,31.71 24.337,31.71 24.758,31.71 25.176,32.129 25.176,35.856 25.257,35.937 25.499,35.937 25.58,35.856 25.58,32.129 25.999,31.71 26.99,31.71 J7.C22@27.38,31.32
FMC_HYPER2_CSN0: J7.D24 U1.A3 | length 48.6
  Top Layer w0.15: U1.A3@10.716,39.375 9.858,38.517 8.708,38.517 7.353,37.163 7.353,36.976 7.711,36.618 7.711,36.504 7.54,36.333 7.426,36.333 6.841,36.918 6.726,36.918 6.555,36.746 6.555,36.632 6.596,36.591 6.596,36.405 6.543,36.352 5.992,35.802 5.992,35.456 6.4,35.048 6.892,35.048 8.863,37.019 8.977,37.019 9.148,36.848 9.148,36.733 7.781,35.366 7.781,35.18 7.913,35.048 8.141,35.048 8.755,35.048 8.837,35.13 8.89,35.183 8.89,35.369 8.713,35.547 8.713,35.661 8.884,35.833 8.998,35.833 9.312,35.519 9.426,35.519 9.598,35.69 9.598,35.804 9.449,35.954 9.449,36.068 9.62,36.239 9.734,36.239 9.747,36.226 9.933,36.226 10.56,36.853 10.687,36.98 22.965,36.98 23.444,36.98 23.576,36.848 23.576,35.683 23.657,35.602 23.899,35.602 23.98,35.683 23.98,37.802 24.061,37.882 24.303,37.882 24.384,37.802 24.384,35.928 24.465,35.848 24.707,35.848 24.788,35.928 24.788,36.848 24.92,36.98 25.513,36.98 v1(26.05,36.98)
  Bottom Layer w0.15: v1(26.05,36.98) 26.05,36.959 27.154,35.855 29.668,35.855 30.17,35.352 30.17,34.917 29.689,34.435 29.225,34.435 J7.D24@28.65,33.86
FMC_HYPER2_CSN1: J7.D21 U2.A3 | length 35.4
  Top Layer w0.15: U2.A3@11.716,28.093 14.659,25.149 14.922,25.149 14.997,25.149 15.129,25.281 15.129,26.244 15.21,26.325 15.452,26.325 15.533,26.244 15.533,24.924 15.614,24.844 15.856,24.844 15.937,24.924 15.937,25.354 16.018,25.435 16.26,25.435 16.341,25.354 16.341,24.924 16.422,24.844 16.664,24.844 16.745,24.924 16.745,25.087 16.826,25.168 17.068,25.168 17.149,25.087 17.149,24.924 17.23,24.844 17.472,24.844 17.553,24.924 17.553,25.074 17.634,25.155 17.876,25.155 17.957,25.074 17.957,24.924 18.038,24.844 18.28,24.844 18.361,24.924 18.361,25.074 18.442,25.155 18.684,25.155 18.765,25.074 18.765,24.924 18.846,24.844 19.088,24.844 19.169,24.924 19.169,25.074 19.25,25.155 19.492,25.155 19.573,25.074 19.573,24.924 19.654,24.844 19.896,24.844 19.977,24.924 19.977,25.074 20.058,25.155 20.3,25.155 20.381,25.074 20.381,24.924 20.462,24.844 20.704,24.844 20.785,24.924 20.785,25.074 20.866,25.155 21.108,25.155 21.189,25.074 21.189,24.924 21.27,24.844 21.512,24.844 21.593,24.924 21.593,26.019 21.674,26.1 21.916,26.1 21.997,26.019 21.997,24.924 22.078,24.844 22.32,24.844 22.401,24.924 22.401,26.827 22.482,26.908 22.724,26.908 22.805,26.827 22.805,25.239 22.886,25.158 23.128,25.158 23.209,25.239 23.209,27.63 23.29,27.711 23.532,27.711 23.613,27.63 23.613,26.804 23.745,26.672 23.931,26.672 24.326,27.067 24.341,27.082 v1(24.916,27.082)
  Bottom Layer w0.15: v1(24.916,27.082) 25.889,28.055 27.426,28.055 27.991,28.62 27.991,28.892 28.604,29.505 28.604,30.004 J7.D21@28.65,30.05
FMC_HYPER2_D0: J7.D11 U1.D3 U2.D3 | length 58
  Top Layer w0.15: U1.D3@10.716,42.375 11.15,42.375 11.75,42.975 12.881,42.975 13.58,43.674 19.424,43.674 v1(19.783,43.315) ; U2.D3@11.716,31.093 12.15,31.093 12.75,31.693 12.988,31.693 14.003,31.693 14.089,31.778 14.275,31.778 14.407,31.646 14.407,31.369 14.488,31.288 14.73,31.288 14.811,31.369 14.811,32.006 14.943,32.138 19.447,32.138 v1(19.783,32.138)
  Bottom Layer w0.15: v1(19.783,43.315) 19.783,42.675 19.783,42.584 19.915,42.453 20.336,42.453 20.417,42.372 20.417,42.129 20.336,42.049 19.281,42.049 19.2,41.968 19.2,41.725 19.281,41.645 19.651,41.645 19.783,41.513 19.783,41.438 v1(19.783,32.138) 19.773,32.128 19.773,25.132 19.773,24.361 19.792,24.342 19.792,24.156 19.787,24.151 19.787,24.037 19.959,23.866 20.073,23.866 20.319,24.111 20.433,24.111 20.604,23.94 20.604,23.826 20.358,23.58 20.358,23.466 20.53,23.294 20.644,23.294 20.89,23.54 21.004,23.54 21.176,23.369 21.176,23.254 20.93,23.009 20.93,22.894 21.101,22.723 21.215,22.723 21.461,22.969 21.575,22.969 21.747,22.797 21.747,22.683 21.501,22.437 21.501,22.323 21.673,22.152 21.787,22.152 22.033,22.397 22.147,22.397 22.318,22.226 22.318,22.112 22.073,21.866 22.073,21.752 22.244,21.58 22.358,21.58 22.604,21.826 22.718,21.826 22.89,21.655 22.89,21.54 22.644,21.295 22.644,21.18 22.815,21.009 22.93,21.009 23.175,21.255 23.29,21.255 23.461,21.083 23.461,20.969 23.215,20.723 23.215,20.609 23.387,20.438 23.501,20.438 23.747,20.683 23.861,20.683 24.032,20.512 24.032,20.398 23.787,20.152 23.787,20.038 23.958,19.866 24.072,19.866 24.077,19.871 24.263,19.871 24.316,19.818 26.215,17.919 28.081,17.919 J7.D11@28.65,17.35
FMC_HYPER2_D1: J7.D12 U1.D2 U2.D2 | length 67.1
  Top Layer w0.15: U1.D2@11.716,42.375 12.316,41.775 13.316,41.775 14.177,40.914 17.553,40.914 17.628,40.914 17.76,41.046 17.76,43.293 17.841,43.374 18.083,43.374 18.164,43.293 18.164,40.995 18.245,40.914 18.487,40.914 18.568,40.995 18.568,43.293 18.649,43.374 18.891,43.374 18.972,43.293 18.972,40.995 19.053,40.914 19.295,40.914 19.376,40.995 19.376,42.311 19.457,42.391 19.699,42.391 19.78,42.311 19.78,41.046 19.912,40.914 20,40.914 20.398,40.914 v1(20.425,40.941) ; U2.D2@12.716,31.093 13.316,30.493 13.629,30.493 13.942,30.493 14.716,29.719 14.81,29.625 15.381,29.625 15.513,29.493 15.513,28.493 15.594,28.412 15.836,28.412 15.917,28.493 15.917,29.493 16.049,29.625 18.209,29.625 18.341,29.757 18.341,31.757 18.422,31.838 18.664,31.838 18.745,31.757 18.745,29.706 18.826,29.625 19.068,29.625 19.149,29.706 19.149,31.545 19.23,31.626 19.472,31.626 19.553,31.545 19.553,29.757 19.685,29.625 20.049,29.625 20.392,29.625 v1(20.425,29.658)
  Bottom Layer w0.15: v1(20.425,40.941) v1(20.425,29.658) 20.425,24.544 25.779,19.189 28.081,19.189 J7.D12@28.65,18.62
FMC_HYPER2_D2: J7.D14 U1.C4 U2.C4 | length 75.9
  Top Layer w0.15: U1.C4@9.716,41.375 9.716,40.941 10.152,40.504 10.152,40.373 10.75,39.775 10.881,39.775 11.116,39.541 11.116,39.409 11.293,39.232 11.482,39.043 11.482,38.856 9.796,37.17 9.796,37.055 9.967,36.884 10.081,36.884 12.192,38.995 12.306,38.995 12.477,38.823 12.477,38.709 11.391,37.623 11.391,37.509 11.563,37.337 11.677,37.337 12.763,38.423 12.877,38.423 13.049,38.252 13.049,38.138 12.534,37.623 12.534,37.509 12.705,37.337 12.82,37.337 12.911,37.428 13.097,37.428 13.15,37.375 13.236,37.289 21.183,37.289 21.419,37.525 v1(21.54,37.525) ; U2.C4@10.716,30.093 10.716,29.658 11.152,29.222 11.152,29.091 11.75,28.493 11.881,28.493 12.316,28.058 12.316,27.927 13.618,26.625 15.016,26.625 16.232,26.625 16.364,26.493 16.364,25.797 16.445,25.716 16.687,25.716 16.768,25.797 16.768,26.769 16.849,26.85 17.091,26.85 17.172,26.769 17.172,25.53 17.253,25.449 17.495,25.449 17.576,25.53 17.576,26.769 17.657,26.85 17.899,26.85 17.98,26.769 17.98,25.53 18.061,25.449 18.303,25.449 18.384,25.53 18.384,26.769 18.465,26.85 18.707,26.85 18.788,26.769 18.788,25.53 18.869,25.449 19.111,25.449 19.192,25.53 19.192,26.769 19.273,26.85 19.515,26.85 19.596,26.769 19.596,25.53 19.677,25.449 19.919,25.449 20,25.53 20,26.769 20.081,26.85 20.323,26.85 20.404,26.769 20.404,25.53 20.485,25.449 20.727,25.449 20.808,25.53 20.808,26.493 20.94,26.625 21.015,26.625 v1(21.54,26.625)
  Bottom Layer w0.15: v1(21.54,26.625) v1@21.54,26.645 ; v1(21.54,37.525) 21.54,36.746 21.54,36.452 21.672,36.32 21.684,36.32 21.765,36.239 21.765,35.997 21.684,35.916 21.431,35.916 21.35,35.835 21.35,35.593 21.431,35.512 21.684,35.512 21.765,35.431 21.765,35.189 21.684,35.108 21.396,35.108 21.315,35.027 21.315,34.785 21.396,34.704 21.684,34.704 21.765,34.623 21.765,34.381 21.684,34.3 21.672,34.3 21.54,34.168 21.54,32.412 21.672,32.28 21.684,32.28 21.765,32.199 21.765,31.957 21.684,31.876 21.396,31.876 21.315,31.795 21.315,31.553 21.396,31.472 21.482,31.472 21.563,31.391 21.563,31.149 21.482,31.068 21.396,31.068 21.315,30.987 21.315,30.745 21.396,30.664 21.463,30.664 21.543,30.583 21.543,30.341 21.463,30.26 21.396,30.26 21.315,30.179 21.315,29.937 21.396,29.856 21.463,29.856 21.543,29.775 21.543,29.533 21.463,29.452 21.396,29.452 21.315,29.371 21.315,29.129 21.396,29.048 21.463,29.048 21.543,28.967 21.543,28.725 21.463,28.644 21.396,28.644 21.315,28.563 21.315,28.321 21.396,28.24 21.463,28.24 21.543,28.159 21.543,27.917 21.463,27.836 21.396,27.836 21.315,27.755 21.315,27.513 21.396,27.432 21.408,27.432 21.54,27.3 21.54,27.225 v1@21.54,26.645 ; J7.D14@28.65,21.16 27.925,21.885 24.474,21.885 21.568,24.791 21.568,26.616 v1@21.54,26.645
FMC_HYPER2_D3: J7.D15 U1.D4 U2.D4 | length 70.4
  Top Layer w0.15: U1.D4@9.716,42.375 10.116,42.775 10.116,43.442 12.149,45.475 15.448,45.475 15.523,45.475 15.655,45.607 15.655,46.919 15.736,47 15.978,47 16.059,46.919 16.059,45.556 16.14,45.475 16.382,45.475 16.463,45.556 16.463,46.919 16.544,47 16.786,47 16.867,46.919 16.867,45.556 16.948,45.475 17.19,45.475 17.271,45.556 17.271,46.093 17.352,46.174 17.594,46.174 17.675,46.093 17.675,45.607 17.807,45.475 21.036,45.475 v1(22.6,45.475) ; U2.D4@10.716,31.093 11.152,31.529 11.152,32.094 12.64,33.583 13.39,34.333 14.925,34.333 15.792,35.2 18.239,35.2 18.314,35.2 18.446,35.332 18.446,35.366 18.526,35.447 18.769,35.447 18.85,35.366 18.85,34.611 18.93,34.531 19.173,34.531 19.254,34.611 19.254,36.119 19.334,36.2 19.577,36.2 19.658,36.119 19.658,34.979 19.738,34.898 19.981,34.898 20.062,34.979 20.062,36.119 20.142,36.2 20.385,36.2 20.466,36.119 20.466,34.67 20.546,34.59 20.789,34.59 20.87,34.67 20.87,35.456 20.95,35.537 21.193,35.537 21.274,35.456 21.274,35.332 21.405,35.2 21.642,35.2 v1(22.6,34.242)
  Bottom Layer w0.15: v1(22.6,45.475) v1(22.6,34.242) 22.6,25.739 25.339,23 27.581,23 28.105,22.476 28.604,22.476 J7.D15@28.65,22.43
FMC_HYPER2_D4: J7.C10 U1.D5 U2.D5 | length 61.5
  Top Layer w0.15: U1.D5@8.716,42.375 9.15,42.809 9.15,45.738 10.712,47.3 17.85,47.3 v1(18.25,46.9) ; U2.D5@9.716,31.093 10.116,31.493 10.116,32.359 10.116,35.231 11.062,36.177 17.926,36.177 18.131,35.972 v1(18.239,35.972)
  Bottom Layer w0.15: v1(18.25,46.9) 18.244,46.894 18.244,35.978 v1(18.239,35.972) 18.239,24.361 26.52,16.08 J7.C10@27.38,16.08
FMC_HYPER2_D5: J7.C11 U1.E3 U2.E3 | length 62.3
  Top Layer w0.15: U1.E3@10.716,43.375 11.166,43.825 12.291,44.95 12.725,44.95 12.857,45.082 12.857,45.094 12.937,45.175 13.18,45.175 13.261,45.094 13.261,45.031 13.341,44.95 13.584,44.95 13.665,45.031 13.665,45.094 13.745,45.175 13.988,45.175 14.069,45.094 14.069,45.031 14.149,44.95 14.392,44.95 14.473,45.031 14.473,45.094 14.553,45.175 14.796,45.175 14.877,45.094 14.877,45.031 14.957,44.95 15.2,44.95 15.281,45.031 15.281,45.094 15.361,45.175 15.604,45.175 15.685,45.094 15.685,45.031 15.765,44.95 16.008,44.95 16.089,45.031 16.089,45.094 16.169,45.175 16.412,45.175 16.493,45.094 16.493,45.031 16.573,44.95 16.816,44.95 16.897,45.031 16.897,45.094 16.977,45.175 17.22,45.175 17.301,45.094 17.301,45.082 17.432,44.95 18.244,44.95 v1(18.9,44.95) ; U2.E3@11.716,32.093 11.915,32.291 12.253,32.63 12.44,32.63 12.52,32.55 12.634,32.55 12.806,32.721 12.806,32.835 12.619,33.023 12.619,33.137 12.79,33.308 12.904,33.308 13.149,33.064 13.263,33.064 13.434,33.235 13.434,33.35 13.297,33.487 13.297,33.674 13.656,34.033 15.044,34.033 15.927,34.033 16.059,34.165 16.059,34.819 16.14,34.9 16.382,34.9 16.463,34.819 16.463,34.114 16.544,34.033 16.786,34.033 16.867,34.114 16.867,34.819 16.948,34.9 17.19,34.9 17.271,34.819 17.271,34.114 17.352,34.033 17.594,34.033 17.675,34.114 17.675,34.819 17.756,34.9 17.998,34.9 18.079,34.819 18.079,34.165 18.211,34.033 18.556,34.033 18.873,34.033 v1(18.9,34.006)
  Bottom Layer w0.15: v1@18.887,33.729 18.9,33.742 18.9,39.328 18.9,39.403 18.768,39.535 18.625,39.535 18.544,39.616 18.544,39.858 18.625,39.939 19.402,39.939 19.483,40.02 19.483,40.262 19.402,40.343 18.625,40.343 18.544,40.424 18.544,40.666 18.625,40.747 19.402,40.747 19.483,40.828 19.483,41.07 19.402,41.151 18.625,41.151 18.544,41.232 18.544,41.474 18.625,41.555 18.819,41.555 18.9,41.636 18.9,41.878 18.819,41.959 18.625,41.959 18.544,42.04 18.544,42.282 18.625,42.363 19.402,42.363 19.483,42.444 19.483,42.686 19.402,42.767 18.645,42.767 18.564,42.848 18.564,43.09 18.645,43.171 19.032,43.171 19.113,43.252 19.113,43.494 19.032,43.575 18.9,43.707 18.9,44.569 v1(18.9,44.95) ; 18.9,33.668 18.887,33.654 18.887,24.513 26.05,17.35 J7.C11@27.38,17.35
FMC_HYPER2_D6: J7.C14 U1.E2 U2.E2 | length 66.1
  Top Layer w0.15: U1.E2@11.716,43.375 12.691,44.35 12.939,44.35 13.014,44.35 13.146,44.482 13.146,44.569 13.226,44.65 13.469,44.65 13.55,44.569 13.55,44.412 13.63,44.332 13.873,44.332 13.954,44.412 13.954,44.569 14.034,44.65 14.277,44.65 14.358,44.569 14.358,44.412 14.438,44.332 14.681,44.332 14.762,44.412 14.762,44.569 14.842,44.65 15.085,44.65 15.166,44.569 15.166,44.412 15.246,44.332 15.489,44.332 15.57,44.412 15.57,44.569 15.65,44.65 15.893,44.65 15.974,44.569 15.974,44.412 16.054,44.332 16.297,44.332 16.378,44.412 16.378,44.569 16.458,44.65 16.701,44.65 16.782,44.569 16.782,44.412 16.862,44.332 17.105,44.332 17.186,44.412 17.186,44.569 17.266,44.65 17.509,44.65 17.59,44.569 17.59,44.412 17.67,44.332 17.913,44.332 17.994,44.412 17.994,44.569 18.074,44.65 18.317,44.65 18.398,44.569 18.398,44.482 18.529,44.35 18.9,44.35 20.211,44.35 20.702,44.35 20.952,44.6 v1(21.015,44.6) ; U2.E2@12.716,32.093 14.104,33.481 14.716,33.481 14.791,33.481 14.922,33.612 14.922,33.652 15.003,33.733 15.246,33.733 15.326,33.652 15.326,33.098 15.407,33.017 15.65,33.017 15.73,33.098 15.73,33.652 15.811,33.733 16.054,33.733 16.134,33.652 16.134,33.098 16.215,33.017 16.458,33.017 16.538,33.098 16.538,33.652 16.619,33.733 16.862,33.733 16.942,33.652 16.942,33.098 17.023,33.017 17.266,33.017 17.346,33.098 17.346,33.652 17.427,33.733 17.67,33.733 17.75,33.652 17.75,33.098 17.831,33.017 18.074,33.017 18.154,33.098 18.154,33.524 18.235,33.605 18.478,33.605 18.558,33.524 18.558,33.098 18.639,33.017 18.882,33.017 18.962,33.098 18.962,33.4 19.043,33.481 19.286,33.481 19.366,33.4 19.366,33.098 19.447,33.017 19.69,33.017 19.77,33.098 19.77,34.517 19.851,34.598 20.094,34.598 20.174,34.517 20.174,33.612 20.306,33.481 20.613,33.481 v1(21.015,33.481)
  Bottom Layer w0.15: v1(21.015,44.6) 21.015,44.032 21.015,43.7 21.015,43.551 20.883,43.419 20.475,43.419 20.394,43.339 20.394,43.096 20.475,43.015 21.122,43.015 21.203,42.935 21.203,42.692 21.122,42.611 20.797,42.611 20.717,42.531 20.717,42.288 20.797,42.207 20.883,42.207 21.015,42.076 21.015,40.723 21.147,40.591 21.218,40.591 21.299,40.511 21.299,40.268 21.218,40.187 20.806,40.187 20.725,40.107 20.725,39.864 20.806,39.783 21.684,39.783 21.765,39.703 21.765,39.46 21.684,39.379 20.806,39.379 20.725,39.299 20.725,39.056 20.806,38.975 21.684,38.975 21.765,38.895 21.765,38.652 21.684,38.571 20.806,38.571 20.725,38.491 20.725,38.248 20.806,38.167 20.955,38.167 21.036,38.087 21.036,37.844 20.955,37.763 20.806,37.763 20.725,37.683 20.725,37.44 20.806,37.359 20.934,37.359 21.015,37.279 21.015,37.036 20.934,36.955 20.806,36.955 20.725,36.875 20.725,36.632 20.806,36.551 21.159,36.551 21.24,36.471 21.24,36.228 21.159,36.147 20.806,36.147 20.725,36.067 20.725,35.824 20.806,35.743 20.883,35.743 21.015,35.612 21.015,35.537 v1(21.015,33.481) 21.015,24.75 24.605,21.16 J7.C14@27.38,21.16